# EAGLE board temp-battery-board (EAGLE 6.2)
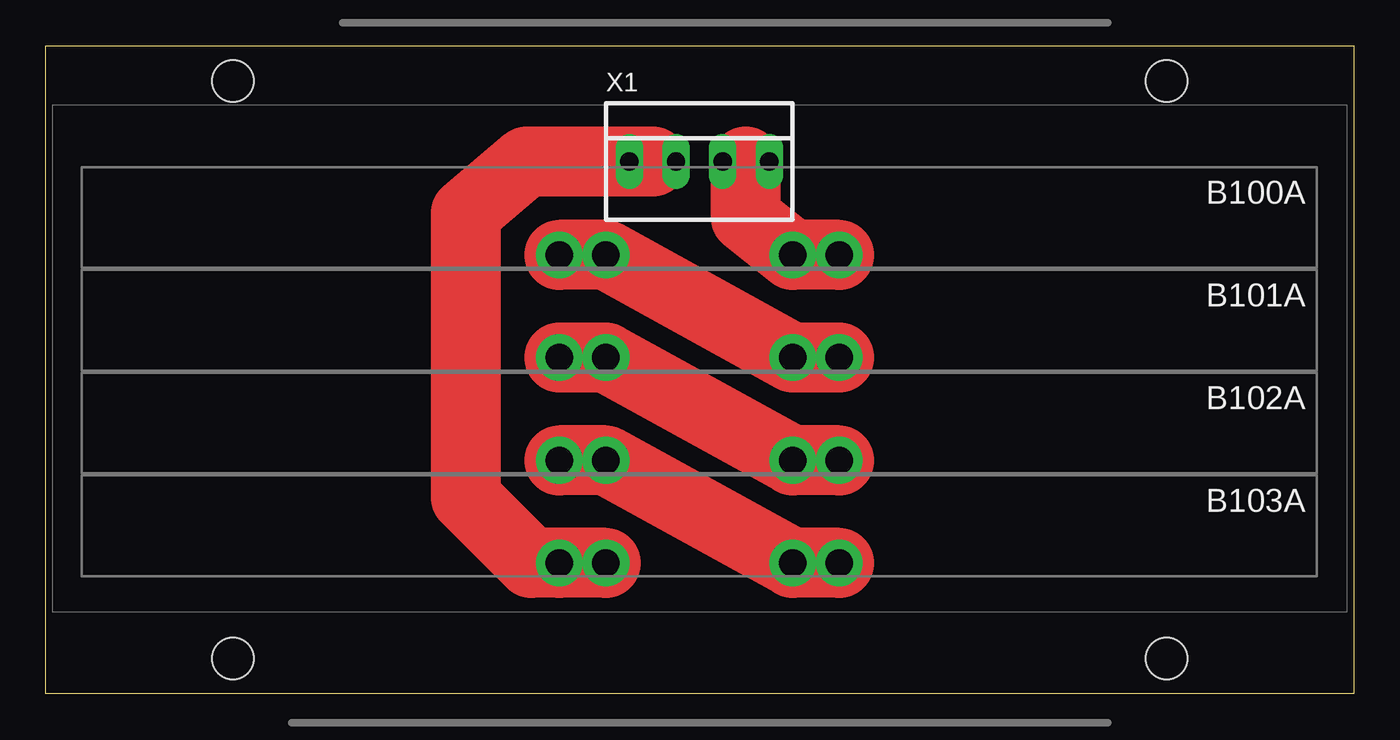
[diagram p0: board, top side]
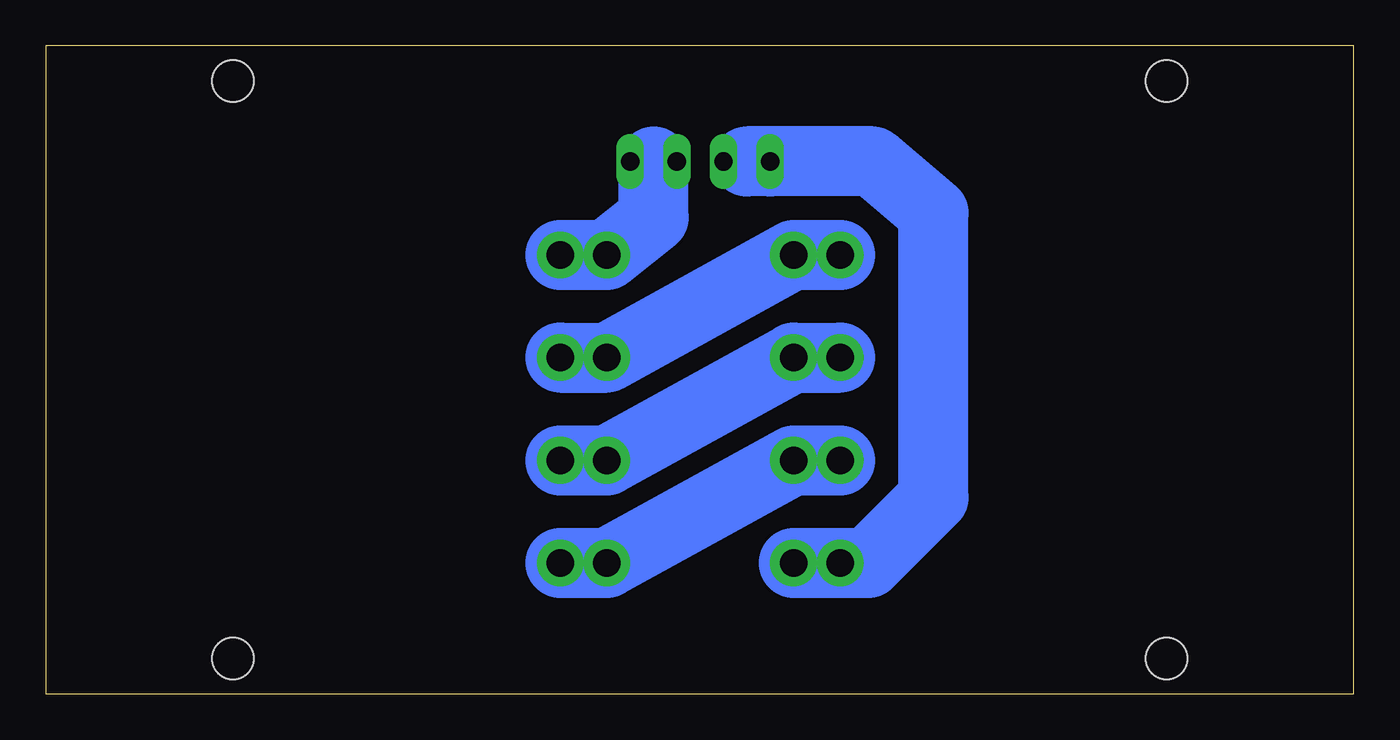
[diagram p1: board, bottom side, seen from below]

Size 71.17 x 35.24 mm. Coordinates in mm from the lower left corner, seen from the top.
Outline: 0,0 0,35.24 71.17,35.24 71.17,0 0,0
Copper layers (1+2*3+16): Top 0.0432mm / dielectric 12mil / Route2 0.0356mm / dielectric 28mil / Route3 0.0356mm / dielectric 12mil / Bottom 0.0432mm
Design rules: minimum track width 6mil, minimum drill 8mil, track to track 6mil, track to pad 6mil, pad to pad 6mil, via to via 6mil, smd to smd 6mil, copper to edge 20mil, drill to drill 16mil, minimum pad ring 0.2118mm, minimum via ring 0.2118mm, stop-mask expansion 3mil, vias tented up to drill 0mil, thermal gap 10mil
Holes 2.26 mm at 60.99,1.91 10.19,1.91 60.99,33.34 10.19,33.34
tKeepout: area 59,31.3 to 63,35.4; area 8.2,31.3 to 12.2,35.4; area 8.2,-0.1 to 12.2,3.9; area 59,-0.1 to 63,3.9
bRestrict: area 0,30.5 to 71.2,35.2; area 0,0 to 71.2,4.4

## Footprints (pad centres in the part's own frame; a part is rotated, then mirrored left to right if it is on the bottom)
LIPO-8AHR-PAC = drill 1.499 pad 2.54: B+@1 5.08,2.032; B+@2 7.62,2.032; B-@1 -5.08,2.032; B-@2 -7.62,2.032
22-23-2041 = drill 1 long: 1 -3.81,0; 2 -1.27,0; 3 1.27,0; 4 3.81,0

## Placement (x,y rotation side)
B100A  LIPO-8AHR  [LIPO-8AHR-PAC]  35.56,25.91 180 top
B101A  LIPO-8AHR  [LIPO-8AHR-PAC]  35.56,20.32 180 top
B102A  LIPO-8AHR  [LIPO-8AHR-PAC]  35.56,14.73 180 top
B103A  LIPO-8AHR  [LIPO-8AHR-PAC]  35.56,9.14 180 top
X1  22-23-2041  [22-23-2041]  35.56,28.96 0 top

## Library data of the parts
B100A B101A B102A B103A = battery
X1 = con-molex

## Nets
B2-B3: B101A.B+@1 B101A.B+@2 B102A.B-@1 B102A.B-@2
B3-B4: B102A.B+@1 B102A.B+@2 B103A.B-@1 B103A.B-@2
B+: B103A.B+@1 B103A.B+@2 X1.1 X1.2
B-: B100A.B-@1 B100A.B-@2 X1.3 X1.4
N$7: B100A.B+@1 B100A.B+@2 B101A.B-@1 B101A.B-@2

## Tracks (layer width: path | path; a pad name or v marks a point on that pad's centre or on a via)
B2-B3
  Top 3.81: B102A.B-@2 B102A.B-@1 B101A.B+@1 B101A.B+@2
  Bottom 3.81: B102A.B-@2 B102A.B-@1 B101A.B+@1 B101A.B+@2
B3-B4
  Top 3.81: B103A.B-@2 B103A.B-@1 B102A.B+@1 B102A.B+@2
  Bottom 3.81: B103A.B-@2 B103A.B-@1 B102A.B+@1 B102A.B+@2
B+
  Top 3.81: B103A.B+@1 B103A.B+@2 26.42,7.11 22.86,10.67 22.86,26.16 26.16,28.96 33.02,28.96
  Bottom 0.254: 33.02,28.96 X1.2
  Bottom 3.81: B103A.B+@2 B103A.B+@1 26.42,7.11 22.86,10.67 22.86,26.16 26.16,28.96 X1.1 33.02,28.96
B-
  Top 3.81: B100A.B-@2 B100A.B-@1 38.1,25.91 38.1,28.96
  Bottom 0.254: X1.3 38.1,28.96 X1.4
  Bottom 3.81: B100A.B-@2 B100A.B-@1 38.1,25.91 38.1,28.96
N$7
  Top 3.81: B101A.B-@2 B101A.B-@1 B100A.B+@1 B100A.B+@2
  Bottom 3.81: B101A.B-@2 B101A.B-@1 B100A.B+@1 B100A.B+@2